# Altium PCB AphelionGroundStation.PcbDoc (part 2 of 3)
Units mm, origin at the board's own origin, x right, y up, seen from the top; angles counter-clockwise.
Board outline 70.66 x 90.48 mm, 2 copper layers (Top Layer, Bottom Layer); 32 components, 39 nets, 122 pads, 24 vias.
Unrouted connection lines stored in the file: 1.
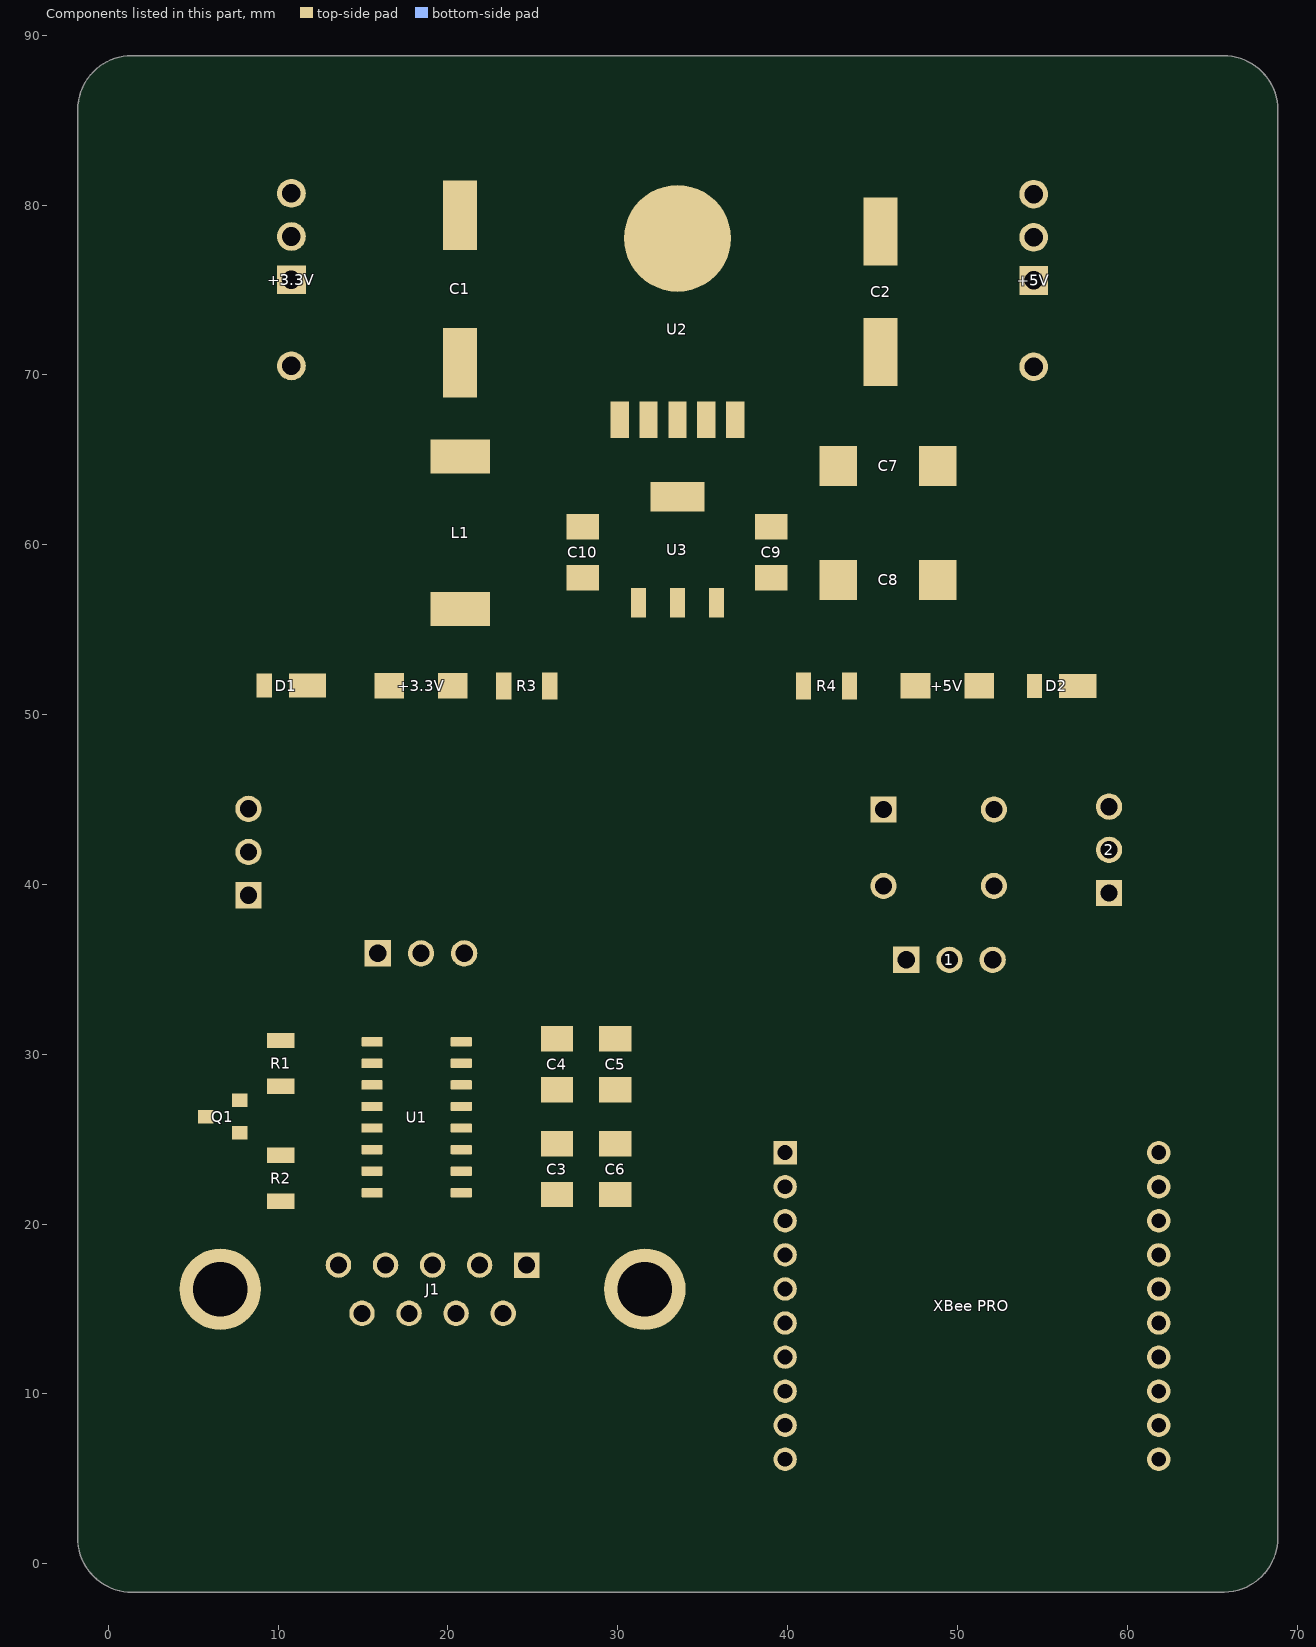
[diagram p2: the components of this part, seen from the top]

## Via types
v1: diameter 0.6, hole 0.3, Top Layer to Bottom Layer, 12 vias
v2: diameter 0.5, hole 0.3, Top Layer to Bottom Layer, 8 vias
v3: diameter 5, hole 3, Top Layer to Bottom Layer, 4 vias

## Nets (pads, with @x,y where several pads share a name; then routed paths per layer and width w, separated by ;. In a path a pad name is that pad's centre, name@x,y a point inside that pad or via, vN(x,y) a via of type N, cw(c..) or ccw(c..) an arc to the next point about the centre after c; other vN are vias at no path point) (continued)
copper on no net: (continued)
  Top Layer w0.025: 28.067,44.628 28.372,44.628 ; 28.067,44.653 28.346,44.653 ; 28.067,44.679 28.346,44.679 ; 28.067,44.704 28.346,44.704 ; 28.067,44.729 28.346,44.729 ; 28.067,44.755 28.346,44.755 ; 28.067,44.78 28.321,44.78 ; 28.067,44.806 28.321,44.806 ; 28.067,44.831 28.346,44.831 ; 28.067,44.856 28.321,44.856 ; 28.067,44.882 28.321,44.882 ; 28.067,44.907 28.321,44.907 ; 28.067,44.933 28.346,44.933 ; 28.067,44.958 28.321,44.958 ; 28.067,44.983 28.321,44.983 ; 28.067,45.009 28.321,45.009 ; 28.067,45.034 28.346,45.034 ; 28.067,45.06 28.346,45.06 ; 28.067,45.085 28.346,45.085 ; 28.067,45.11 28.346,45.11 ; 28.067,45.136 28.346,45.136 ; 28.067,45.161 28.346,45.161 ; 28.092,44.552 28.448,44.552 ; 28.092,44.577 28.448,44.577 ; 28.092,44.602 28.397,44.602 ; 28.092,45.187 28.448,45.187 ; 28.092,45.212 28.448,45.212 ; 28.118,44.475 28.931,44.475 ; 28.118,44.501 28.905,44.501 ; 28.118,44.526 28.956,44.526 ; 28.118,45.237 28.981,45.237 ; 28.118,45.263 28.956,45.263 ; 28.118,45.288 28.931,45.288 ; 28.169,44.425 28.88,44.425 ; 28.169,44.45 28.905,44.45 ; 28.169,45.314 28.905,45.314 ; 28.169,45.339 28.905,45.339 ; 28.219,44.399 28.829,44.399 ; 28.219,45.364 28.88,45.364 ; 28.219,45.39 28.88,45.39 ; 28.245,44.374 28.829,44.374 ; 28.296,45.415 28.778,45.415 ; 28.321,44.323 28.778,44.323 ; 28.321,44.348 28.778,44.348 ; 28.321,45.441 28.778,45.441 ; 28.397,45.466 28.651,45.466 ; 28.397,45.491 28.651,45.491 ; 28.448,44.298 28.6,44.298 ; 28.6,44.552 28.981,44.552 ; 28.6,44.577 28.981,44.577 ; 28.6,45.212 28.981,45.212 ; 28.626,45.187 28.981,45.187 ; 28.677,44.602 28.981,44.602 ; 28.677,44.628 28.981,44.628 ; 28.702,45.136 28.981,45.136 ; 28.702,45.161 28.981,45.161 ; 28.727,44.653 29.007,44.653 ; 28.727,44.679 29.007,44.679 ; 28.727,45.085 29.007,45.085 ; 28.727,45.11 29.007,45.11 ; 28.753,44.704 29.007,44.704 ; 28.753,44.729 29.007,44.729 ; 28.753,44.755 29.007,44.755 ; 28.753,44.78 29.007,44.78 ; 28.753,44.806 29.007,44.806 ; 28.753,44.831 29.007,44.831 ; 28.753,44.856 29.007,44.856 ; 28.753,44.882 29.007,44.882 ; 28.753,44.907 29.007,44.907 ; 28.753,44.933 29.007,44.933 ; 28.753,44.958 29.007,44.958 ; 28.753,44.983 29.007,44.983 ; 28.753,45.009 29.007,45.009 ; 28.753,45.034 29.007,45.034 ; 28.753,45.06 29.007,45.06 ; 29.185,42.57 29.439,42.57 ; 29.185,42.596 29.439,42.596 ; 29.185,42.621 29.439,42.621 ; 29.185,42.647 29.439,42.647 ; 29.185,42.672 29.439,42.672 ; 29.185,42.697 29.439,42.697 ; 29.185,42.723 29.439,42.723 ; 29.185,42.748 29.439,42.748 ; 29.185,42.774 29.439,42.774 ; 29.185,42.799 29.439,42.799 ; 29.185,42.824 29.439,42.824 ; 29.185,42.85 29.439,42.85 ; 29.185,42.875 29.439,42.875 ; 29.185,42.901 29.439,42.901 ; 29.185,42.926 29.439,42.926 ; 29.185,42.951 29.439,42.951 ; 29.185,42.977 29.439,42.977 ; 29.185,43.002 29.439,43.002 ; 29.185,43.028 29.439,43.028 ; 29.185,43.053 29.439,43.053 ; 29.185,43.078 29.439,43.078 ; 29.185,43.104 29.439,43.104 ; 29.185,43.129 29.439,43.129 ; 29.185,43.155 29.439,43.155 ; 29.185,43.18 29.439,43.18 ; 29.185,43.205 29.439,43.205 ; 29.185,43.231 29.439,43.231 ; 29.185,43.256 29.439,43.256 ; 29.185,43.282 29.439,43.282 ; 29.185,43.307 29.439,43.307 ; 29.185,43.332 29.489,43.332 ; 29.185,43.358 29.489,43.358 ; 29.185,43.383 29.54,43.383 ; 29.185,43.409 29.54,43.409 ; 29.185,43.434 29.642,43.434 ; 29.185,43.459 30.074,43.459 ; 29.185,43.485 30.074,43.485 ; 29.185,43.51 30.074,43.51 ; 29.185,43.536 30.074,43.536 ; 29.185,43.561 30.023,43.561 ; 29.185,43.586 29.997,43.586 ; 29.185,43.612 29.439,43.612 ; 29.185,43.637 29.439,43.637 ; 29.185,43.663 29.439,43.663 ; 29.185,43.688 29.439,43.688 ; 29.185,43.713 29.439,43.713 ; 29.185,43.739 29.439,43.739 ; 29.185,43.764 29.439,43.764 ; 29.185,43.79 29.439,43.79 ; 29.185,43.815 29.439,43.815 ; 29.185,43.84 29.439,43.84 ; 29.185,43.866 29.439,43.866 ; 29.185,43.891 29.439,43.891 ; 29.185,43.917 29.439,43.917 ; 29.185,43.942 29.439,43.942 ; 29.185,43.967 29.439,43.967 ; 29.185,43.993 29.439,43.993 ; 29.185,44.018 29.439,44.018 ; 29.185,44.044 29.439,44.044 ; 29.185,44.069 29.439,44.069 ; 29.185,44.094 29.439,44.094 ; 29.185,44.12 29.439,44.12 ; 29.185,44.145 29.439,44.145 ; 29.185,44.171 29.439,44.171 ; 29.185,44.196 29.439,44.196 ; 29.185,44.221 29.439,44.221 ; 29.185,44.247 29.439,44.247 ; 29.185,44.272 29.439,44.272 ; 29.185,44.298 29.439,44.298 ; 29.185,44.323 29.439,44.323 ; 29.185,44.348 29.439,44.348 ; 29.185,44.374 29.439,44.374 ; 29.185,44.399 29.972,44.399 ; 29.185,44.425 30.048,44.425 ; 29.185,44.45 30.048,44.45 ; 29.185,44.475 30.074,44.475 ; 29.185,44.501 30.074,44.501 ; 29.185,44.526 30.074,44.526 ; 29.185,44.552 29.566,44.552 ; 29.185,44.577 29.566,44.577 ; 29.185,44.602 29.515,44.602 ; 29.185,44.628 29.489,44.628 ; 29.185,44.653 29.464,44.653 ; 29.185,44.679 29.439,44.679 ; 29.185,44.704 29.439,44.704 ; 29.185,44.729 29.439,44.729 ; 29.185,44.755 29.439,44.755 ; 29.185,44.78 29.439,44.78 ; 29.185,44.806 29.439,44.806 ; 29.185,44.831 29.439,44.831 ; 29.185,44.856 29.439,44.856 ; 29.185,44.882 29.439,44.882 ; 29.185,44.907 29.439,44.907 ; 29.185,44.933 29.439,44.933 ; 29.185,44.958 29.439,44.958 ; 29.185,44.983 29.439,44.983 ; 29.185,45.009 29.439,45.009 ; 29.185,45.034 29.439,45.034 ; 29.185,45.06 29.439,45.06 ; 29.185,45.085 29.439,45.085 ; 29.185,45.11 29.439,45.11 ; 29.185,45.136 29.489,45.136 ; 29.185,45.161 29.489,45.161 ; 29.185,45.187 29.566,45.187 ; 29.185,45.212 29.566,45.212 ; 29.185,45.237 30.099,45.237 ; 29.185,45.263 30.074,45.263 ; 29.185,45.288 30.074,45.288 ; 29.185,45.314 30.048,45.314 ; 29.185,45.339 30.048,45.339 ; 29.185,45.364 29.997,45.364 ; 29.185,45.39 29.997,45.39 ; 29.185,45.415 29.439,45.415 ; 29.185,45.441 29.439,45.441 ; 29.21,42.52 29.439,42.52 ; 29.21,42.545 29.439,42.545 ; 29.21,45.491 29.235,45.491 ; 29.261,49.174 32.487,49.174 ; 29.261,49.2 32.487,49.2 ; 29.261,49.225 32.487,49.225 ; 29.261,49.251 32.436,49.251 ; 29.261,49.276 32.436,49.276 ; 29.261,49.301 32.436,49.301 ; 29.261,49.327 32.436,49.327 ; 29.261,49.352 32.41,49.352 ; 29.261,49.378 32.41,49.378 ; 29.261,49.403 32.41,49.403 ; 29.261,49.428 32.385,49.428 ; 29.261,49.454 32.385,49.454 ; 29.261,49.479 32.385,49.479 ; 29.261,49.505 32.385,49.505 ; 29.261,49.53 32.385,49.53 ; 29.261,49.555 32.385,49.555 ; 29.261,49.581 32.385,49.581 ; 29.261,49.606 32.385,49.606 ; 29.261,49.632 32.385,49.632 ; 29.261,49.657 32.385,49.657 ; 29.261,49.682 32.385,49.682 ; 29.261,49.708 32.385,49.708 ; 29.261,49.733 32.385,49.733 ; 29.261,49.759 32.385,49.759 ; 29.261,49.784 32.385,49.784 ; 29.261,49.809 32.385,49.809 ; 29.261,49.835 32.385,49.835 ; 29.261,49.86 32.385,49.86 ; 29.261,49.886 32.385,49.886 ; 29.261,49.911 32.385,49.911 ; 29.261,49.936 32.385,49.936 ; 29.261,49.962 32.385,49.962 ; 29.261,49.987 32.385,49.987 ; 29.261,50.013 32.41,50.013 ; 29.261,50.038 32.41,50.038 ; 29.261,50.063 32.41,50.063 ; 29.261,50.089 32.41,50.089 ; 29.261,50.114 32.436,50.114 ; 29.261,50.14 32.436,50.14 ; 29.261,50.165 32.436,50.165 ; 29.261,50.19 32.436,50.19 ; 29.261,50.216 32.487,50.216 ; 29.261,50.241 32.487,50.241 ; 29.261,50.267 32.487,50.267 ; 29.261,50.292 32.512,50.292 ; 29.312,49.124 32.512,49.124 ; 29.312,49.149 32.512,49.149 ; 29.312,50.317 32.537,50.317 ; 29.388,45.466 29.413,45.466 ; 29.388,45.491 29.413,45.491 ; 29.413,49.098 32.537,49.098 ; 29.413,50.343 32.537,50.343 ; 29.489,43.612 29.972,43.612 ; 29.489,43.637 29.972,43.637 ; 29.489,44.374 29.972,44.374 ; 29.489,45.415 29.972,45.415 ; 29.489,50.368 32.563,50.368 ; 29.54,44.323 29.921,44.323 ; 29.54,44.348 29.921,44.348 ; 29.54,45.441 29.921,45.441 ; 29.566,43.663 29.87,43.663 ; 29.566,49.073 32.563,49.073 ; 29.642,44.298 29.82,44.298 ; 29.642,45.466 29.82,45.466 ; 29.642,45.491 29.82,45.491 ; 29.642,50.394 32.563,50.394 ; 29.667,43.688 29.769,43.688 ; 29.667,49.047 32.588,49.047 ; 29.693,43.434 30.099,43.434 ; 29.743,44.552 30.099,44.552 ; 29.743,44.577 30.099,44.577 ; 29.743,45.212 30.099,45.212 ; 29.769,43.383 30.099,43.383 ; 29.769,43.409 30.099,43.409 ; 29.769,45.187 30.099,45.187 ; 29.769,49.022 32.588,49.022 ; 29.82,43.358 30.099,43.358 ; 29.82,44.602 30.099,44.602 ; 29.82,44.628 30.099,44.628 ; 29.82,45.136 30.099,45.136 ; 29.82,45.161 30.099,45.161 ; 29.82,50.419 32.588,50.419 ; 29.845,43.256 30.099,43.256 ; 29.845,43.282 30.099,43.282 ; 29.845,43.307 30.099,43.307 ; 29.845,43.332 30.099,43.332 ; 29.845,44.653 30.099,44.653 ; 29.845,44.679 30.099,44.679 ; 29.845,44.704 30.099,44.704 ; 29.845,44.729 30.099,44.729 ; 29.845,45.034 30.099,45.034 ; 29.845,45.06 30.099,45.06 ; 29.845,45.085 30.099,45.085 ; 29.845,45.11 30.099,45.11 ; 29.87,42.52 30.099,42.52 ; 29.87,42.545 30.099,42.545 ; 29.87,42.57 30.099,42.57 ; 29.87,42.596 30.099,42.596 ; 29.87,42.621 30.099,42.621 ; 29.87,42.647 30.099,42.647 ; 29.87,42.672 30.099,42.672 ; 29.87,42.697 30.099,42.697 ; 29.87,42.723 30.099,42.723 ; 29.87,42.748 30.099,42.748 ; 29.87,42.774 30.099,42.774 ; 29.87,42.799 30.099,42.799 ; 29.87,42.824 30.099,42.824 ; 29.87,42.85 30.099,42.85 ; 29.87,42.875 30.099,42.875 ; 29.87,42.901 30.099,42.901 ; 29.87,42.926 30.099,42.926 ; 29.87,42.951 30.099,42.951 ; 29.87,42.977 30.099,42.977 ; 29.87,43.002 30.099,43.002 ; 29.87,43.028 30.099,43.028 ; 29.87,43.053 30.099,43.053 ; 29.87,43.078 30.099,43.078 ; 29.87,43.104 30.099,43.104 ; 29.87,43.129 30.099,43.129 ; 29.87,43.155 30.099,43.155 ; 29.87,43.18 30.099,43.18 ; 29.87,43.205 30.099,43.205 ; 29.87,43.231 30.099,43.231 ; 29.87,44.755 30.099,44.755 ; 29.87,44.78 30.099,44.78 ; 29.87,44.806 30.099,44.806 ; 29.87,44.831 30.099,44.831 ; 29.87,44.856 30.15,44.856 ; 29.87,44.882 30.15,44.882 ; 29.87,44.907 30.15,44.907 ; 29.87,44.933 30.15,44.933 ; 29.87,44.958 30.099,44.958 ; 29.87,44.983 30.099,44.983 ; 29.87,45.009 30.099,45.009 ; 29.972,48.997 32.614,48.997 ; 30.023,50.444 32.614,50.444 ; 30.023,50.47 32.639,50.47 ; 30.099,47.142 32.487,47.142 ; 30.099,52.299 36.957,52.299 ; 30.099,52.324 36.957,52.324 ; 30.124,47.092 32.487,47.092 ; 30.124,47.117 32.487,47.117 ; 30.124,47.168 32.512,47.168 ; 30.124,47.193 32.512,47.193 ; 30.124,52.222 36.932,52.222 ; 30.124,52.248 36.932,52.248 ; 30.124,52.273 36.932,52.273 ; 30.124,52.349 36.932,52.349 ; 30.15,47.219 32.512,47.219 ; 30.15,47.244 32.537,47.244 ; 30.15,52.375 36.906,52.375 ; 30.175,47.066 32.487,47.066 ; 30.175,48.946 32.664,48.946 ; 30.175,48.971 32.614,48.971 ; 30.175,52.172 36.881,52.172 ; 30.175,52.197 36.881,52.197 ; 30.201,47.041 32.436,47.041 ; 30.201,47.269 32.563,47.269 ; 30.201,47.295 32.563,47.295 ; 30.201,47.32 32.563,47.32 ; 30.201,47.346 32.588,47.346 ; 30.201,50.495 32.664,50.495 ; 30.201,52.121 36.855,52.121 ; 30.201,52.146 36.855,52.146 ; 30.201,52.4 36.855,52.4 ; 30.201,52.426 36.855,52.426 ; 30.251,42.774 30.632,42.774 ; 30.251,42.799 30.531,42.799 ; 30.251,42.824 30.531,42.824 ; 30.251,42.85 30.531,42.85 ; 30.251,42.875 30.531,42.875 ; 30.251,42.901 30.531,42.901 ; 30.251,42.926 30.531,42.926 ; 30.251,44.704 30.531,44.704 ; 30.251,44.729 30.531,44.729 ; 30.251,44.755 30.531,44.755 ; 30.251,44.78 30.531,44.78 ; 30.251,44.806 31.242,44.806 ; 30.251,44.831 31.242,44.831 ; 30.251,44.856 31.242,44.856 ; 30.251,44.882 31.242,44.882 ; 30.251,44.907 31.242,44.907 ; 30.251,44.933 31.242,44.933 ; 30.251,44.958 31.242,44.958 ; 30.251,44.983 31.242,44.983 ; 30.251,45.009 31.242,45.009 ; 30.251,45.034 30.531,45.034 ; 30.251,45.06 30.531,45.06 ; 30.251,46.99 32.436,46.99 ; 30.251,47.015 32.436,47.015 ; 30.251,47.371 32.588,47.371 ; 30.251,52.07 36.805,52.07 ; 30.251,52.095 36.805,52.095 ; 30.251,52.451 36.805,52.451 ; 30.251,52.476 36.805,52.476 ; 30.277,42.697 31.191,42.697 ; 30.277,42.723 31.191,42.723 ; 30.277,42.748 31.191,42.748 ; 30.277,42.951 30.531,42.951 ; 30.277,42.977 30.531,42.977 ; 30.277,43.002 31.191,43.002 ; 30.277,44.628 30.582,44.628 ; 30.277,44.653 30.531,44.653 ; 30.277,44.679 30.531,44.679 ; 30.277,45.085 30.531,45.085 ; 30.277,45.11 30.531,45.11 ; 30.277,45.136 30.531,45.136 ; 30.277,45.161 30.531,45.161 ; 30.277,46.939 32.41,46.939 ; 30.277,46.965 32.41,46.965 ; 30.277,47.396 32.588,47.396 ; 30.302,42.672 31.191,42.672 ; 30.302,43.028 31.191,43.028 ; 30.302,43.053 31.191,43.053 ; 30.302,43.078 31.191,43.078 ; 30.302,43.485 31.166,43.485 ; 30.302,43.51 31.166,43.51 ; 30.302,43.536 31.166,43.536 ; 30.302,44.526 31.166,44.526 ; 30.302,44.552 30.632,44.552 ; 30.302,44.577 30.632,44.577 ; 30.302,44.602 30.582,44.602 ; 30.302,45.187 30.632,45.187 ; 30.302,45.212 30.632,45.212 ; 30.302,45.237 31.166,45.237 ; 30.302,45.263 31.166,45.263 ; 30.302,46.914 32.41,46.914 ; 30.302,47.422 32.614,47.422 ; 30.302,47.447 32.614,47.447 ; 30.302,47.473 32.614,47.473 ; 30.302,50.521 32.664,50.521 ; 30.302,51.968 36.754,51.968 ; 30.302,51.994 36.754,51.994 ; 30.302,52.019 36.754,52.019 ; 30.302,52.045 36.779,52.045 ; 30.302,52.502 31.902,52.502 ; 30.302,52.527 31.826,52.527 ; 30.353,42.621 31.191,42.621 ; 30.353,42.647 31.191,42.647 ; 30.353,43.104 31.191,43.104 ; 30.353,43.459 31.166,43.459 ; 30.353,43.561 30.378,43.561 ; 30.353,44.475 31.191,44.475 ; 30.353,44.501 31.191,44.501 ; 30.353,45.288 31.14,45.288 ; 30.353,46.888 31.775,46.888 ; 30.353,47.498 32.664,47.498 ; 30.353,47.523 32.664,47.523 ; 30.353,47.549 32.664,47.549 ; 30.353,48.92 32.664,48.92 ; 30.353,51.892 36.703,51.892 ; 30.353,51.918 36.703,51.918 ; 30.353,51.943 36.703,51.943 ; 30.353,52.553 31.801,52.553 ; 30.353,52.578 31.801,52.578 ; 30.404,42.57 31.191,42.57 ; 30.404,42.596 31.191,42.596 ; 30.404,43.129 31.191,43.129 ; 30.404,43.155 31.191,43.155 ; 30.404,43.434 30.582,43.434 ; 30.404,43.561 31.115,43.561 ; 30.404,43.586 31.09,43.586 ; 30.404,44.425 31.166,44.425 ; 30.404,44.45 31.166,44.45 ; 30.404,45.314 31.09,45.314 ; 30.404,45.339 31.09,45.339 ; 30.404,46.838 31.75,46.838 ; 30.404,46.863 31.775,46.863 ; 30.404,47.574 32.664,47.574 ; 30.404,47.6 32.715,47.6 ; 30.404,48.844 32.741,48.844 ; 30.404,48.87 32.715,48.87 ; 30.404,48.895 32.715,48.895 ; 30.404,51.841 36.652,51.841 ; 30.404,51.867 36.652,51.867 ; 30.404,52.603 31.725,52.603 ; 30.429,43.612 31.064,43.612 ; 30.429,43.637 31.064,43.637 ; 30.429,44.399 31.064,44.399 ; 30.429,45.364 31.064,45.364 ; 30.429,45.39 31.064,45.39 ; 30.429,46.812 31.674,46.812 ; 30.429,47.625 32.715,47.625 ; 30.429,48.768 32.868,48.768 ; 30.429,48.793 32.817,48.793 ; 30.429,48.819 32.766,48.819 ; 30.429,50.546 32.715,50.546 ; 30.429,50.571 32.715,50.571 ; 30.429,50.597 32.766,50.597 ; 30.429,50.622 32.817,50.622 ; 30.429,51.791 36.627,51.791 ; 30.429,51.816 36.627,51.816 ; 30.429,52.629 31.674,52.629 ; 30.429,52.654 31.674,52.654 ; 30.455,43.383 30.531,43.383 ; 30.455,43.409 30.531,43.409 ; 30.455,44.374 31.064,44.374 ; 30.455,46.761 31.623,46.761 ; 30.455,46.787 31.623,46.787 ; 30.455,47.65 32.715,47.65 ; 30.455,47.676 32.715,47.676 ; 30.455,48.666 33.02,48.666 ; 30.455,48.692 32.918,48.692 ; 30.455,48.717 32.918,48.717 ; 30.455,48.743 32.868,48.743 ; 30.455,50.648 32.842,50.648 ; 30.455,50.673 32.842,50.673 ; 30.455,51.74 36.601,51.74 ; 30.455,51.765 36.601,51.765 ; 30.455,52.68 31.623,52.68 ; 30.48,42.545 30.912,42.545 ; 30.48,43.18 31.191,43.18 ; 30.48,43.205 31.191,43.205 ; 30.48,45.415 30.963,45.415 ; 30.48,47.701 32.715,47.701 ; 30.48,50.698 32.918,50.698 ; 30.48,50.724 32.918,50.724 ; 30.505,43.663 30.963,43.663 ; 30.505,46.736 31.572,46.736 ; 30.505,47.727 32.715,47.727 ; 30.505,48.59 33.045,48.59 ; 30.505,48.616 33.045,48.616 ; 30.505,48.641 33.045,48.641 ; 30.505,50.749 33.02,50.749 ; 30.505,50.775 33.045,50.775 ; 30.505,51.714 36.551,51.714 ; 30.505,52.705 31.572,52.705 ; 30.531,42.52 30.836,42.52 ; 30.531,44.323 31.013,44.323 ; 30.531,44.348 31.013,44.348 ; 30.531,45.441 30.963,45.441 ; 30.531,46.711 31.547,46.711 ; 30.531,47.752 32.715,47.752 ; 30.531,47.777 32.741,47.777 ; 30.531,47.803 32.766,47.803 ; 30.531,48.463 33.045,48.463 ; 30.531,48.489 33.045,48.489 ; 30.531,48.514 33.045,48.514 ; 30.531,48.539 33.045,48.539 ; 30.531,48.565 33.096,48.565 ; 30.531,50.8 33.147,50.8 ; 30.531,50.825 33.147,50.825 ; 30.531,50.851 33.249,50.851 ; 30.531,51.638 36.525,51.638 ; 30.531,51.664 36.525,51.664 ; 30.531,51.689 36.525,51.689 ; 30.531,52.73 31.521,52.73 ; 30.531,52.756 31.521,52.756 ; 30.582,46.66 31.496,46.66 ; 30.582,46.685 31.496,46.685 ; 30.582,47.828 32.766,47.828 ; 30.582,47.854 32.817,47.854 ; 30.582,48.412 33.045,48.412 ; 30.582,48.438 33.045,48.438 ; 30.582,50.876 36.474,50.876 ; 30.582,50.902 36.474,50.902 ; 30.582,50.927 36.474,50.927 ; 30.582,50.952 36.474,50.952 ; 30.582,51.613 36.474,51.613 ; 30.582,52.781 31.471,52.781 ; 30.582,52.807 31.471,52.807 ; 30.607,46.609 31.42,46.609 ; 30.607,46.634 31.42,46.634 ; 30.607,47.879 32.817,47.879 ; 30.607,47.904 32.817,47.904 ; 30.607,48.311 32.995,48.311 ; 30.607,48.336 32.995,48.336 ; 30.607,48.362 33.02,48.362 ; 30.607,48.387 33.02,48.387 ; 30.607,50.978 36.449,50.978 ; 30.607,51.003 36.449,51.003 ; 30.607,51.537 36.449,51.537 ; 30.607,51.562 36.449,51.562 ; 30.607,51.587 36.474,51.587 ; 30.632,45.466 30.836,45.466 ; 30.632,45.491 30.836,45.491 ; 30.632,46.584 31.344,46.584 ; 30.632,47.93 32.817,47.93 ; 30.632,47.955 32.842,47.955 ; 30.632,48.235 32.944,48.235 ; 30.632,48.26 32.944,48.26 ; 30.632,48.285 32.944,48.285 ; 30.632,51.029 36.424,51.029 ; 30.632,51.054 36.424,51.054 ; 30.632,51.079 36.424,51.079 ; 30.632,51.105 36.424,51.105 ; 30.632,51.13 36.424,51.13 ; 30.632,51.511 36.424,51.511 ; 30.632,52.832 31.394,52.832 ; 30.632,52.857 31.344,52.857 ; 30.658,43.688 30.785,43.688 ; 30.658,44.298 30.861,44.298 ; 30.683,46.558 31.318,46.558 ; 30.683,47.981 32.842,47.981 ; 30.683,48.006 32.842,48.006 ; 30.683,48.108 32.893,48.108 ; 30.683,48.133 32.918,48.133 ; 30.683,48.158 32.918,48.158 ; 30.683,48.184 32.918,48.184 ; 30.683,48.209 32.918,48.209 ; 30.683,51.156 36.373,51.156 ; 30.683,51.181 36.373,51.181 ; 30.683,51.206 36.373,51.206 ; 30.683,51.232 36.373,51.232 ; 30.683,51.41 36.373,51.41 ; 30.683,51.435 36.373,51.435 ; 30.683,51.46 36.373,51.46 ; 30.683,51.486 36.373,51.486 ; 30.683,52.883 31.293,52.883 ; 30.683,52.908 31.293,52.908 ; 30.734,46.507 31.293,46.507 ; 30.734,46.533 31.293,46.533 ; 30.734,48.031 32.868,48.031 ; 30.734,48.057 32.868,48.057 ; 30.734,48.082 32.893,48.082 ; 30.734,51.257 36.322,51.257 ; 30.734,51.283 36.322,51.283 ; 30.734,51.308 36.322,51.308 ; 30.734,51.333 36.322,51.333 ; 30.734,51.359 36.322,51.359 ; 30.734,51.384 36.322,51.384 ; 30.734,52.934 31.242,52.934 ; 30.759,46.482 31.191,46.482 ; 30.759,52.959 31.191,52.959 ; 30.759,52.984 31.191,52.984 ; 30.785,46.431 31.166,46.431 ; 30.785,46.457 31.166,46.457 ; 30.785,53.01 31.166,53.01 ; 30.836,46.406 31.09,46.406 ; 30.836,53.035 31.09,53.035 ; 30.861,42.774 31.191,42.774 ; 30.861,43.434 31.191,43.434 ; 30.861,45.187 31.191,45.187 ; 30.861,45.212 31.166,45.212 ; 30.861,46.38 31.064,46.38 ; 30.861,53.061 31.064,53.061 ; 30.861,53.086 31.064,53.086 ; 30.912,43.383 31.191,43.383 ; 30.912,43.409 31.191,43.409 ; 30.912,44.552 31.115,44.552 ; 30.912,44.577 31.115,44.577 ; 30.912,45.136 31.191,45.136 ; 30.912,45.161 31.191,45.161 ; 30.912,46.33 30.988,46.33 ; 30.912,46.355 30.988,46.355 ; 30.912,53.111 30.988,53.111 ; 30.912,53.137 30.988,53.137 ; 30.937,42.52 31.191,42.52 ; 30.937,42.545 31.191,42.545 ; 30.937,42.799 31.191,42.799 ; 30.937,42.824 31.191,42.824 ; 30.937,42.85 31.191,42.85 ; 30.937,42.875 31.191,42.875 ; 30.937,42.901 31.191,42.901 ; 30.937,42.926 31.191,42.926 ; 30.937,42.951 31.191,42.951 ; 30.937,42.977 31.191,42.977 ; 30.937,43.231 31.191,43.231 ; 30.937,43.256 31.191,43.256 ; 30.937,43.282 31.191,43.282 ; 30.937,43.307 31.191,43.307 ; 30.937,43.332 31.191,43.332 ; 30.937,43.358 31.191,43.358 ; 30.937,45.06 31.191,45.06 ; 30.937,45.085 31.191,45.085 ; 30.937,45.11 31.191,45.11 ; 30.963,44.602 31.064,44.602 ; 30.963,44.628 31.064,44.628 ; 30.963,45.034 31.191,45.034 ; 31.369,44.323 31.623,44.323 ; 31.369,44.348 31.623,44.348 ; 31.369,44.374 31.623,44.374 ; 31.369,44.399 31.623,44.399 ; 31.369,44.425 31.623,44.425 ; 31.369,44.45 31.623,44.45 ; 31.369,44.475 31.623,44.475 ; 31.369,44.501 31.623,44.501 ; 31.369,44.526 31.623,44.526 ; 31.369,44.552 31.623,44.552 ; 31.369,44.577 31.623,44.577 ; 31.369,44.602 31.623,44.602 ; 31.369,44.628 31.623,44.628 ; 31.369,44.653 31.623,44.653 ; 31.369,44.679 31.623,44.679 ; 31.369,44.704 31.623,44.704 ; 31.369,44.729 31.623,44.729 ; 31.369,44.755 31.623,44.755 ; 31.369,44.78 31.623,44.78 ; 31.369,44.806 31.623,44.806 ; 31.369,44.831 31.623,44.831 ; 31.369,44.856 31.623,44.856 ; 31.369,44.882 31.623,44.882 ; 31.369,44.907 31.623,44.907 ; 31.369,44.933 31.623,44.933 ; 31.369,44.958 31.623,44.958 ; 31.369,44.983 31.623,44.983 ; 31.369,45.009 31.623,45.009 ; 31.369,45.034 31.623,45.034 ; 31.369,45.06 31.623,45.06 ; 31.369,45.085 31.674,45.085 ; 31.369,45.11 31.674,45.11 ; 31.369,45.136 31.674,45.136 ; 31.369,45.161 31.674,45.161 ; 31.369,45.187 31.775,45.187 ; 31.369,45.212 31.775,45.212 ; 31.369,45.237 32.283,45.237 ; 31.369,45.263 32.283,45.263 ; 31.369,45.288 32.258,45.288 ; 31.369,45.314 32.258,45.314 ; 31.369,45.339 32.258,45.339 ; 31.369,45.364 32.233,45.364 ; 31.369,45.39 32.207,45.39 ; 31.369,45.415 31.623,45.415 ; 31.369,45.441 31.648,45.441 ; 31.394,42.545 31.674,42.545 ; 31.394,42.57 31.674,42.57 ; 31.394,42.596 31.674,42.596 ; 31.394,42.621 31.674,42.621 ; 31.394,42.647 31.674,42.647 ; 31.394,42.672 31.674,42.672 ; 31.394,42.697 31.674,42.697 ; 31.394,42.723 31.674,42.723 ; 31.394,42.748 31.674,42.748 ; 31.394,42.774 31.674,42.774 ; 31.394,42.799 31.674,42.799 ; 31.394,42.824 31.674,42.824 ; 31.394,42.85 31.674,42.85 ; 31.394,42.875 31.674,42.875 ; 31.394,42.901 31.674,42.901 ; 31.394,42.926 31.674,42.926 ; 31.394,42.951 31.674,42.951 ; 31.394,42.977 31.674,42.977 ; 31.394,43.002 31.674,43.002 ; 31.394,43.028 31.674,43.028 ; 31.394,43.053 31.674,43.053 ; 31.394,43.078 31.674,43.078 ; 31.394,43.104 31.674,43.104 ; 31.394,43.129 31.674,43.129 ; 31.394,43.155 31.674,43.155 ; 31.394,43.18 31.674,43.18 ; 31.394,43.205 31.674,43.205 ; 31.394,43.231 31.674,43.231 ; 31.394,43.256 31.674,43.256 ; 31.394,43.282 31.674,43.282 ; 31.394,43.307 31.674,43.307 ; 31.394,43.332 31.725,43.332 ; 31.394,43.358 31.725,43.358 ; 31.394,43.383 31.75,43.383 ; 31.394,43.409 31.75,43.409 ; 31.394,43.434 31.852,43.434 ; 31.394,43.459 32.106,43.459 ; 31.394,43.485 32.156,43.485 ; 31.394,43.51 32.156,43.51 ; 31.394,43.536 32.182,43.536 ; 31.394,43.561 31.674,43.561 ; 31.394,43.586 31.674,43.586 ; 31.394,43.612 31.674,43.612 ; 31.394,43.637 31.674,43.637 ; 31.42,42.52 31.674,42.52 ; 31.42,43.663 31.674,43.663 ; 31.42,45.466 31.445,45.466 ; 31.42,45.491 31.445,45.491 ; 31.699,43.561 32.233,43.561 ; 31.699,43.586 32.233,43.586 ; 31.725,43.612 32.182,43.612 ; 31.725,43.637 32.182,43.637 ; 31.725,45.415 32.156,45.415 ; 31.725,45.441 32.106,45.441 ; 31.826,43.663 32.106,43.663 ; 31.826,45.466 32.029,45.466 ; 31.826,45.491 32.029,45.491 ; 31.902,46.888 32.385,46.888 ; 31.928,43.434 32.106,43.434 ; 31.928,43.688 32.004,43.688 ; 31.953,45.187 32.283,45.187 ; 31.953,45.212 32.283,45.212 ; 31.953,52.502 35.103,52.502 ; 31.979,46.838 32.385,46.838 ; 31.979,46.863 32.385,46.863 ; 32.004,43.383 32.055,43.383 ; 32.004,43.409 32.08,43.409 ; 32.029,45.11 32.334,45.11 ; 32.029,45.136 32.334,45.136 ; 32.029,45.161 32.334,45.161 ; 32.029,46.812 32.385,46.812 ; 32.055,44.323 32.334,44.323 ; 32.055,44.348 32.334,44.348 ; 32.055,44.374 32.334,44.374 ; 32.055,44.399 32.334,44.399 ; 32.055,44.425 32.334,44.425 ; 32.055,44.45 32.334,44.45 ; 32.055,44.475 32.334,44.475 ; 32.055,44.501 32.334,44.501 ; 32.055,44.526 32.334,44.526 ; 32.055,44.552 32.334,44.552 ; 32.055,44.577 32.334,44.577 ; 32.055,44.602 32.334,44.602 ; 32.055,44.628 32.334,44.628 ; 32.055,44.653 32.334,44.653 ; 32.055,44.679 32.334,44.679 ; 32.055,44.704 32.334,44.704 ; 32.055,44.729 32.334,44.729 ; 32.055,44.755 32.334,44.755 ; 32.055,44.78 32.334,44.78 ; 32.055,44.806 32.334,44.806 ; 32.055,44.831 32.334,44.831 ; 32.055,44.856 32.334,44.856 ; 32.055,44.882 32.334,44.882 ; 32.055,44.907 32.334,44.907 ; 32.055,44.933 32.334,44.933 ; 32.055,44.958 32.334,44.958 ; 32.055,44.983 32.334,44.983 ; 32.055,45.009 32.334,45.009 ; 32.055,45.034 32.334,45.034 ; 32.055,45.06 32.334,45.06 ; 32.055,45.085 32.334,45.085 ; 32.055,52.527 35.001,52.527 ; 32.106,46.761 32.334,46.761 ; 32.106,46.787 32.334,46.787 ; 32.131,52.553 34.925,52.553 ; 32.156,52.578 34.9,52.578 ; 32.182,43.002 32.487,43.002 ; 32.182,43.028 32.487,43.028 ; 32.182,43.053 32.487,43.053 ; 32.182,43.078 32.487,43.078 ; 32.182,43.104 32.487,43.104 ; 32.182,43.129 32.487,43.129 ; 32.182,43.155 32.487,43.155 ; 32.182,43.18 32.487,43.18 ; 32.182,46.736 32.334,46.736 ; 32.207,42.774 33.147,42.774 ; 32.207,42.799 32.512,42.799 ; 32.207,42.824 32.512,42.824 ; 32.207,42.85 32.487,42.85 ; 32.207,42.875 32.487,42.875 ; 32.207,42.901 32.487,42.901 ; 32.207,42.926 32.487,42.926 ; 32.207,42.951 32.487,42.951 ; 32.207,42.977 32.487,42.977 ; 32.207,43.205 32.487,43.205 ; 32.207,43.231 32.487,43.231 ; 32.207,43.256 32.487,43.256 ; 32.207,43.282 32.487,43.282 ; 32.207,43.307 32.487,43.307 ; 32.207,43.332 32.487,43.332 ; 32.207,43.358 32.512,43.358 ; 32.207,43.383 32.537,43.383 ; 32.207,43.409 32.537,43.409 ; 32.207,43.434 32.614,43.434 ; 32.258,42.697 33.147,42.697 ; 32.258,42.723 33.147,42.723 ; 32.258,42.748 33.147,42.748 ; 32.258,43.459 33.147,43.459 ; 32.258,43.485 33.147,43.485 ; 32.258,43.51 33.147,43.51 ; 32.258,46.711 32.283,46.711 ; 32.258,52.603 34.798,52.603 ; 32.283,42.621 33.147,42.621 ; 32.283,42.647 33.147,42.647 ; 32.283,42.672 33.147,42.672 ; 32.283,43.536 33.147,43.536 ; 32.283,43.561 33.147,43.561 ; 32.283,52.629 34.747,52.629 ; 32.283,52.654 32.309,52.654 ; 32.309,43.586 33.147,43.586 ; 32.334,52.654 34.747,52.654 ; 32.36,42.57 32.842,42.57 ; 32.36,42.596 32.842,42.596 ; 32.36,43.612 32.817,43.612 ; 32.36,43.637 32.817,43.637 ; 32.385,42.545 32.817,42.545 ; 32.385,52.68 34.671,52.68 ; 32.436,43.663 32.766,43.663 ; 32.487,42.52 32.715,42.52 ; 32.487,52.705 34.569,52.705 ; 32.537,43.688 32.639,43.688 ; 32.588,52.73 34.468,52.73 ; 32.588,52.756 34.468,52.756 ; 32.664,52.781 34.392,52.781 ; 32.69,52.807 34.366,52.807 ; 32.715,43.434 33.147,43.434 ; 32.715,52.832 34.341,52.832 ; 32.715,52.857 34.341,52.857 ; 32.715,52.883 34.341,52.883 ; 32.715,52.908 34.341,52.908 ; 32.715,52.934 34.341,52.934 ; 32.766,52.959 34.29,52.959 ; 32.766,52.984 34.29,52.984 ; 32.766,53.01 34.29,53.01 ; 32.766,53.035 34.29,53.035 ; 32.766,53.061 34.29,53.061 ; 32.766,53.086 34.29,53.086 ; 32.766,53.111 34.29,53.111 ; 32.766,53.137 34.29,53.137 ; 32.791,43.383 33.147,43.383 ; 32.791,43.409 33.147,43.409 ; 32.791,53.162 34.265,53.162 ; 32.791,53.188 34.265,53.188 ; 32.791,53.213 34.265,53.213 ; 32.791,53.238 34.265,53.238 ; 32.791,53.264 34.265,53.264 ; 32.791,53.289 34.265,53.289 ; 32.817,42.799 33.147,42.799 ; 32.817,42.824 33.147,42.824 ; 32.817,42.85 33.147,42.85 ; 32.817,42.875 33.147,42.875 ; 32.817,43.332 33.147,43.332 ; 32.817,43.358 33.147,43.358 ; 32.817,53.315 34.265,53.315 ; 32.817,53.34 34.265,53.34 ; 32.817,53.365 34.239,53.365 ; 32.817,53.391 34.239,53.391 ; 32.817,53.416 34.239,53.416 ; 32.817,53.442 34.239,53.442 ; 32.817,53.467 34.239,53.467 ; 32.817,53.492 34.239,53.492 ; 32.817,53.518 34.239,53.518 ; 32.817,53.543 34.188,53.543 ; 32.868,42.52 33.147,42.52 ; 32.868,42.545 33.147,42.545 ; 32.868,42.57 33.147,42.57 ; 32.868,42.596 33.147,42.596 ; 32.868,42.901 33.147,42.901 ; 32.868,42.926 33.147,42.926 ; 32.868,42.951 33.147,42.951 ; 32.868,42.977 33.147,42.977 ; 32.868,43.002 33.147,43.002 ; 32.868,43.028 33.147,43.028 ; 32.868,43.053 33.147,43.053 ; 32.868,43.078 33.147,43.078 ; 32.868,43.104 33.147,43.104 ; 32.868,43.129 33.147,43.129 ; 32.868,43.155 33.147,43.155 ; 32.868,43.18 33.147,43.18 ; 32.868,43.205 33.147,43.205 ; 32.868,43.231 33.147,43.231 ; 32.868,43.256 33.147,43.256 ; 32.868,43.282 33.147,43.282 ; 32.868,43.307 33.147,43.307 ; 32.868,43.612 33.147,43.612 ; 32.868,43.637 33.147,43.637 ; 32.868,43.663 33.147,43.663 ; 32.868,43.688 33.147,43.688 ; 32.868,43.713 33.147,43.713 ; 32.868,43.739 33.147,43.739 ; 32.868,43.764 33.147,43.764 ; 32.868,43.79 33.147,43.79 ; 32.868,43.815 33.147,43.815 ; 32.868,43.84 33.147,43.84 ; 32.868,43.866 33.147,43.866 ; 32.868,43.891 33.147,43.891 ; 32.868,43.917 33.147,43.917 ; 32.868,43.942 33.147,43.942 ; 32.868,43.967 33.147,43.967 ; 32.868,43.993 33.147,43.993 ; 32.868,44.018 33.147,44.018 ; 32.868,44.044 33.147,44.044 ; 32.868,44.069 33.147,44.069 ; 32.868,44.094 33.147,44.094 ; 32.868,44.12 33.147,44.12 ; 32.868,44.145 33.122,44.145 ; 32.868,53.569 34.188,53.569 ; 32.868,53.594 34.188,53.594 ; 32.868,53.619 34.188,53.619 ; 32.868,53.645 34.188,53.645 ; 32.868,53.67 34.188,53.67 ; 32.868,53.696 34.188,53.696 ; 32.868,53.721 34.188,53.721 ; 32.918,44.475 33.858,44.475 ; 32.918,44.501 33.858,44.501 ; 32.918,44.526 33.909,44.526 ; 32.918,53.746 34.138,53.746 ; 32.918,53.772 34.138,53.772 ; 32.918,53.797 34.138,53.797 ; 32.918,53.823 34.138,53.823 ; 32.918,53.848 34.138,53.848 ; 32.918,53.873 34.138,53.873 ; 32.918,53.899 34.138,53.899 ; 32.918,53.924 34.138,53.924 ; 32.918,53.95 34.138,53.95 ; 32.969,44.425 33.807,44.425 ; 32.969,44.45 33.807,44.45 ; 32.969,44.552 33.274,44.552 ; 32.969,44.577 33.274,44.577 ; 32.969,45.085 33.249,45.085 ; 32.969,45.11 33.249,45.11 ; 32.969,45.136 33.249,45.136 ; 32.969,45.161 33.249,45.161 ; 32.969,45.187 33.274,45.187 ; 32.995,45.06 33.299,45.06 ; 33.02,44.602 33.198,44.602 ; 33.02,44.628 33.198,44.628 ; 33.02,44.958 33.782,44.958 ; 33.02,44.983 33.68,44.983 ; 33.02,45.009 33.68,45.009 ; 33.02,45.034 33.299,45.034 ; 33.02,45.212 33.274,45.212 ; 33.02,45.237 33.807,45.237 ; 33.02,45.263 33.807,45.263 ; 33.02,45.288 33.858,45.288 ; 33.045,44.399 33.782,44.399 ; 33.045,44.653 33.096,44.653 ; 33.045,44.679 33.096,44.679 ; 33.045,44.907 33.807,44.907 ; 33.045,44.933 33.807,44.933 ; 33.045,45.314 33.909,45.314 ; 33.045,45.339 33.884,45.339 ; 33.096,44.374 33.757,44.374 ; 33.096,44.856 33.858,44.856 ; 33.096,44.882 33.807,44.882 ; 33.096,45.364 33.807,45.364 ; 33.096,45.39 33.807,45.39 ; 33.147,44.323 33.68,44.323 ; 33.147,45.415 33.782,45.415 ; 33.198,44.348 33.68,44.348 ; 33.198,44.806 33.909,44.806 ; 33.198,44.831 33.909,44.831 ; 33.198,45.441 33.706,45.441 ; 33.249,43.51 33.528,43.51 ; 33.249,43.536 33.528,43.536 ; 33.249,43.561 33.528,43.561 ; 33.249,43.586 33.528,43.586 ; 33.249,43.612 33.528,43.612 ; 33.249,43.637 33.528,43.637 ; 33.249,43.663 33.503,43.663 ; 33.299,43.383 33.579,43.383 ; 33.299,43.409 33.579,43.409 ; 33.299,43.434 33.579,43.434 ; 33.299,43.459 33.579,43.459 ; 33.299,43.485 33.579,43.485 ; 33.299,45.466 33.579,45.466 ; 33.299,45.491 33.579,45.491 ; 33.325,44.298 33.528,44.298 ; 33.35,43.282 33.604,43.282 ; 33.35,43.307 33.604,43.307 ; 33.35,43.332 33.579,43.332 ; 33.35,43.358 33.579,43.358 ; 33.376,43.129 33.655,43.129 ; 33.376,43.155 33.655,43.155 ; 33.376,43.18 33.655,43.18 ; 33.376,43.205 33.655,43.205 ; 33.376,43.231 33.604,43.231 ; 33.376,43.256 33.604,43.256 ; 33.401,43.053 33.68,43.053 ; 33.401,43.078 33.68,43.078 ; 33.401,43.104 33.655,43.104 ; 33.426,43.028 33.68,43.028 ; 33.426,44.755 33.909,44.755 ; 33.426,44.78 33.909,44.78 ; 33.452,42.926 33.934,42.926 ; 33.452,42.951 33.706,42.951 ; 33.452,42.977 33.706,42.977 ; 33.452,43.002 33.68,43.002 ; 33.477,42.799 33.909,42.799 ; 33.477,42.824 33.909,42.824 ; 33.477,42.85 33.934,42.85 ; 33.477,42.875 33.934,42.875 ; 33.477,42.901 33.934,42.901 ; 33.528,42.697 33.858,42.697 ; 33.528,42.723 33.909,42.723 ; 33.528,42.748 33.909,42.748 ; 33.528,42.774 33.909,42.774 ; 33.553,42.596 33.858,42.596 ; 33.553,42.621 33.858,42.621 ; 33.553,42.647 33.858,42.647 ; 33.553,42.672 33.858,42.672 ; 33.579,42.52 33.807,42.52 ; 33.579,42.545 33.807,42.545 ; 33.579,42.57 33.858,42.57 ; 33.579,44.552 33.909,44.552 ; 33.579,44.577 33.909,44.577 ; 33.579,45.187 33.807,45.187 ; 33.579,45.212 33.807,45.212 ; 33.63,44.602 33.909,44.602 ; 33.63,44.628 33.909,44.628 ; 33.63,44.704 33.909,44.704 ; 33.63,44.729 33.909,44.729 ; 33.68,44.653 33.909,44.653 ; 33.68,44.679 33.909,44.679 ; 33.68,45.161 33.757,45.161 ; 33.706,45.136 33.757,45.136 ; 33.731,42.951 33.96,42.951 ; 33.731,42.977 33.96,42.977 ; 33.731,43.002 33.985,43.002 ; 33.731,43.028 33.985,43.028 ; 33.731,43.053 33.985,43.053 ; 33.757,43.078 34.011,43.078 ; 33.782,43.104 34.011,43.104 ; 33.782,43.129 34.011,43.129 ; 33.782,43.155 34.011,43.155 ; 33.782,43.18 34.011,43.18 ; 33.782,43.205 34.011,43.205 ; 33.807,43.231 34.036,43.231 ; 33.807,43.256 34.036,43.256 ; 33.807,43.282 34.036,43.282 ; 33.807,43.307 34.265,43.307 ; 33.807,50.851 36.525,50.851 ; 33.858,43.332 34.265,43.332 ; 33.858,43.358 34.265,43.358 ; 33.858,43.383 34.239,43.383 ; 33.858,43.409 34.239,43.409 ; 33.884,43.434 34.239,43.434 ; 33.884,43.459 34.239,43.459 ; 33.884,43.485 34.239,43.485 ; 33.884,43.51 34.188,43.51 ; 33.909,43.536 34.188,43.536 ; 33.909,43.561 34.188,43.561 ; 33.909,43.586 34.188,43.586 ; 33.909,43.612 34.138,43.612 ; 33.909,43.637 34.138,43.637 ; 33.909,50.8 36.525,50.8 ; 33.909,50.825 36.525,50.825 ; 33.96,43.663 34.138,43.663 ; 33.96,48.565 36.525,48.565 ; 34.011,44.628 34.341,44.628 ; 34.011,44.653 34.29,44.653 ; 34.011,44.679 34.29,44.679 ; 34.011,44.704 34.29,44.704 ; 34.011,44.729 34.29,44.729 ; 34.011,44.755 34.29,44.755 ; 34.011,44.78 34.29,44.78 ; 34.011,44.806 34.29,44.806 ; 34.011,44.831 34.29,44.831 ; 34.011,44.856 34.29,44.856 ; 34.011,44.882 34.265,44.882 ; 34.011,44.907 34.265,44.907 ; 34.011,44.933 34.265,44.933 ; 34.011,44.958 34.29,44.958 ; 34.011,44.983 34.29,44.983 ; 34.011,45.009 34.29,45.009 ; 34.011,45.034 34.29,45.034 ; 34.011,45.06 34.29,45.06 ; 34.011,45.085 34.29,45.085 ; 34.011,45.11 34.29,45.11 ; 34.011,45.136 34.341,45.136 ; 34.011,45.161 34.341,45.161 ; 34.011,48.412 36.474,48.412 ; 34.011,48.438 36.474,48.438 ; 34.011,48.463 36.525,48.463 ; 34.011,48.489 36.525,48.489 ; 34.011,48.514 36.525,48.514 ; 34.011,48.539 36.525,48.539 ; 34.011,48.59 36.551,48.59 ; 34.011,48.616 36.551,48.616 ; 34.011,48.641 36.551,48.641 ; 34.011,50.775 36.551,50.775 ; 34.036,44.602 34.341,44.602 ; 34.036,48.362 36.449,48.362 ; 34.036,48.387 36.449,48.387 ; 34.036,48.666 36.576,48.666 ; 34.036,50.749 36.551,50.749 ; 34.061,43.18 34.29,43.18 ; 34.061,43.205 34.29,43.205 ; 34.061,43.231 34.29,43.231 ; 34.061,43.256 34.29,43.256 ; 34.061,43.282 34.265,43.282 ; 34.061,44.526 34.925,44.526 ; 34.061,44.552 34.442,44.552 ; 34.061,44.577 34.442,44.577 ; 34.061,45.187 34.417,45.187 ; 34.061,45.212 34.442,45.212 ; 34.061,45.237 34.925,45.237 ; 34.061,45.263 34.9,45.263 ; 34.061,48.311 36.449,48.311 ; 34.061,48.336 36.449,48.336 ; 34.112,43.053 34.341,43.053 ; 34.112,43.078 34.341,43.078 ; 34.112,43.104 34.341,43.104 ; 34.112,43.129 34.341,43.129 ; 34.112,43.155 34.341,43.155 ; 34.112,44.475 34.9,44.475 ; 34.112,44.501 34.9,44.501 ; 34.112,45.288 34.9,45.288 ; 34.112,48.235 36.424,48.235 ; 34.112,48.26 36.424,48.26 ; 34.112,48.285 36.424,48.285 ; 34.138,42.901 34.366,42.901 ; 34.138,42.926 34.366,42.926 ; 34.138,42.951 34.366,42.951 ; 34.138,42.977 34.366,42.977 ; 34.138,43.002 34.366,43.002 ; 34.138,43.028 34.341,43.028 ; 34.138,44.425 34.849,44.425 ; 34.138,44.45 34.874,44.45 ; 34.138,45.314 34.849,45.314 ; 34.138,45.339 34.849,45.339 ; 34.138,48.133 36.373,48.133 ; 34.138,48.158 36.373,48.158 ; 34.138,48.184 36.373,48.184 ; 34.138,48.209 36.373,48.209 ; 34.138,48.692 36.601,48.692 ; 34.138,48.717 36.601,48.717 ; 34.138,50.698 36.576,50.698 ; 34.138,50.724 36.576,50.724 ; 34.163,42.799 34.595,42.799 ; 34.163,42.824 34.595,42.824 ; 34.163,42.85 34.62,42.85 ; 34.163,42.875 34.62,42.875 ; 34.163,48.082 36.322,48.082 ; 34.163,48.108 36.322,48.108 ; 34.188,44.399 34.798,44.399 ; 34.188,45.364 34.849,45.364 ; 34.188,45.39 34.798,45.39 ; 34.188,48.031 36.322,48.031 ; 34.188,48.057 36.322,48.057 ; 34.188,48.743 36.601,48.743 ; 34.188,48.768 36.627,48.768 ; 34.214,42.697 34.569,42.697 ; 34.214,42.723 34.569,42.723 ; 34.214,42.748 34.569,42.748 ; 34.214,42.774 34.595,42.774 ; 34.214,44.374 34.773,44.374 ; 34.214,47.955 36.424,47.955 ; 34.214,47.981 36.373,47.981 ; 34.214,48.006 36.373,48.006 ; 34.214,50.648 36.601,50.648 ; 34.214,50.673 36.601,50.673 ; 34.239,42.57 34.519,42.57 ; 34.239,42.596 34.519,42.596 ; 34.239,42.621 34.569,42.621 ; 34.239,42.647 34.569,42.647 ; 34.239,42.672 34.569,42.672 ; 34.239,45.415 34.773,45.415 ; 34.239,47.854 36.474,47.854 ; 34.239,47.879 36.449,47.879 ; 34.239,47.904 36.449,47.904 ; 34.239,47.93 36.424,47.93 ; 34.239,48.793 36.627,48.793 ; 34.239,50.622 36.627,50.622 ; 34.29,42.52 34.519,42.52 ; 34.29,42.545 34.519,42.545 ; 34.29,44.323 34.722,44.323 ; 34.29,44.348 34.722,44.348 ; 34.29,45.441 34.747,45.441 ; 34.29,47.803 36.525,47.803 ; 34.29,47.828 36.474,47.828 ; 34.29,48.819 36.627,48.819 ; 34.29,50.597 36.627,50.597 ; 34.315,47.777 36.525,47.777 ; 34.315,48.844 36.652,48.844 ; 34.341,47.6 36.652,47.6 ; 34.341,47.625 36.627,47.625 ; 34.341,47.65 36.601,47.65 ; 34.341,47.676 36.601,47.676 ; 34.341,47.701 36.576,47.701 ; 34.341,47.727 36.551,47.727 ; 34.341,47.752 36.525,47.752 ; 34.341,48.87 36.652,48.87 ; 34.341,48.895 36.652,48.895 ; 34.341,50.546 36.627,50.546 ; 34.341,50.571 36.627,50.571 ; 34.366,45.466 34.62,45.466 ; 34.366,45.491 34.62,45.491 ; 34.392,42.901 34.62,42.901 ; 34.392,42.926 34.62,42.926 ; 34.392,42.951 34.671,42.951 ; 34.392,42.977 34.671,42.977 ; 34.392,47.498 36.703,47.498 ; 34.392,47.523 36.703,47.523 ; 34.392,47.549 36.703,47.549 ; 34.392,47.574 36.652,47.574 ; 34.392,48.92 36.703,48.92 ; 34.392,48.946 36.881,48.946 ; 34.392,50.495 36.855,50.495 ; 34.392,50.521 36.805,50.521 ; 34.417,44.298 34.569,44.298 ; 34.417,50.47 37.059,50.47 ; 34.442,43.002 34.671,43.002 ; 34.442,43.028 34.671,43.028 ; 34.442,43.053 34.671,43.053 ; 34.442,43.078 34.696,43.078 ; 34.442,43.104 34.696,43.104 ; 34.442,47.422 36.754,47.422 ; 34.442,47.447 36.754,47.447 ; 34.442,47.473 36.754,47.473 ; 34.442,48.971 36.881,48.971 ; 34.442,48.997 37.084,48.997 ; 34.442,50.444 37.059,50.444 ; 34.468,43.129 34.696,43.129 ; 34.468,43.155 34.696,43.155 ; 34.468,43.18 34.722,43.18 ; 34.468,43.205 34.747,43.205 ; 34.468,43.231 34.747,43.231 ; 34.468,43.256 34.747,43.256 ; 34.468,47.346 36.855,47.346 ; 34.468,47.371 36.805,47.371 ; 34.468,47.396 36.779,47.396 ; 34.468,49.022 37.287,49.022 ; 34.468,49.047 37.389,49.047 ; 34.468,50.419 37.236,50.419 ; 34.493,43.282 34.773,43.282 ; 34.493,43.307 34.773,43.307 ; 34.493,43.332 34.773,43.332 ; 34.493,47.269 36.855,47.269 ; 34.493,47.295 36.855,47.295 ; 34.493,47.32 36.855,47.32 ; 34.493,49.073 37.465,49.073 ; 34.493,50.368 37.567,50.368 ; 34.493,50.394 37.414,50.394 ; 34.519,43.358 34.773,43.358 ; 34.519,47.244 36.906,47.244 ; 34.519,49.098 37.643,49.098 ; 34.519,50.317 37.744,50.317 ; 34.519,50.343 37.643,50.343 ; 34.544,43.383 34.773,43.383 ; 34.544,43.409 34.773,43.409 ; 34.544,43.434 34.798,43.434 ; 34.544,43.459 34.798,43.459 ; 34.544,43.485 34.798,43.485 ; 34.544,43.51 34.798,43.51 ; 34.544,47.168 36.932,47.168 ; 34.544,47.193 36.932,47.193 ; 34.544,47.219 36.906,47.219 ; 34.544,49.124 37.744,49.124 ; 34.544,49.149 37.744,49.149 ; 34.544,50.292 37.795,50.292 ; 34.569,43.536 34.849,43.536 ; 34.569,43.561 34.849,43.561 ; 34.569,43.586 34.849,43.586 ; 34.569,43.612 34.849,43.612 ; 34.569,43.637 34.849,43.637 ; 34.569,43.663 34.874,43.663 ; 34.569,44.552 34.95,44.552 ; 34.569,44.577 34.95,44.577 ; 34.569,45.212 34.95,45.212 ; 34.569,47.066 36.881,47.066 ; 34.569,47.092 36.932,47.092 ; 34.569,47.117 36.932,47.117 ; 34.569,47.142 36.957,47.142 ; 34.569,49.174 37.795,49.174 ; 34.569,49.2 37.795,49.2 ; 34.569,49.225 37.795,49.225 ; 34.569,50.216 37.795,50.216 ; 34.569,50.241 37.795,50.241 ; 34.569,50.267 37.795,50.267 ; 34.62,45.187 34.95,45.187 ; 34.62,46.99 36.805,46.99 ; 34.62,47.015 36.805,47.015 ; 34.62,47.041 36.855,47.041 ; 34.62,49.251 37.795,49.251 ; 34.62,49.276 37.795,49.276 ; 34.62,49.301 37.795,49.301 ; 34.62,49.327 37.795,49.327 ; 34.62,50.114 37.795,50.114 ; 34.62,50.14 37.795,50.14 ; 34.62,50.165 37.795,50.165 ; 34.62,50.19 37.795,50.19 ; 34.646,44.602 34.95,44.602 ; 34.646,46.939 36.779,46.939 ; 34.646,46.965 36.779,46.965 ; 34.646,49.352 37.795,49.352 ; 34.646,49.378 37.795,49.378 ; 34.646,49.403 37.795,49.403 ; 34.646,50.013 37.795,50.013 ; 34.646,50.038 37.795,50.038 ; 34.646,50.063 37.795,50.063 ; 34.646,50.089 37.795,50.089 ; 34.671,44.628 34.95,44.628 ; 34.671,44.653 34.95,44.653 ; 34.671,44.679 34.95,44.679 ; 34.671,45.11 35.001,45.11 ; 34.671,45.136 34.95,45.136 ; 34.671,45.161 34.95,45.161 ; 34.671,46.812 35.027,46.812 ; 34.671,46.838 35.103,46.838 ; 34.671,46.863 35.103,46.863 ; 34.671,46.888 35.154,46.888 ; 34.671,46.914 36.754,46.914 ; 34.671,49.428 37.795,49.428 ; 34.671,49.454 37.795,49.454 ; 34.671,49.479 37.795,49.479 ; 34.671,49.505 37.795,49.505 ; 34.671,49.53 37.795,49.53 ; 34.671,49.555 37.795,49.555 ; 34.671,49.581 37.795,49.581 ; 34.671,49.606 37.795,49.606 ; 34.671,49.632 37.795,49.632 ; 34.671,49.657 37.795,49.657 ; 34.671,49.682 37.795,49.682 ; 34.671,49.708 37.795,49.708 ; 34.671,49.733 37.795,49.733 ; 34.671,49.759 37.795,49.759 ; 34.671,49.784 37.795,49.784 ; 34.671,49.809 37.795,49.809 ; 34.671,49.835 37.795,49.835 ; 34.671,49.86 37.795,49.86 ; 34.671,49.886 37.795,49.886 ; 34.671,49.911 37.795,49.911 ; 34.671,49.936 37.795,49.936 ; 34.671,49.962 37.795,49.962 ; 34.671,49.987 37.795,49.987 ; 34.696,45.085 35.001,45.085 ; 34.722,44.704 35.001,44.704 ; 34.722,44.729 35.001,44.729 ; 34.722,44.755 35.001,44.755 ; 34.722,44.78 35.001,44.78 ; 34.722,44.806 35.001,44.806 ; 34.722,44.831 35.001,44.831 ; 34.722,44.856 35.001,44.856 ; 34.722,44.882 35.001,44.882 ; 34.722,44.907 35.001,44.907 ; 34.722,44.933 35.001,44.933 ; 34.722,44.958 35.001,44.958 ; 34.722,44.983 35.001,44.983 ; 34.722,45.009 35.001,45.009 ; 34.722,45.034 35.001,45.034 ; 34.722,45.06 35.001,45.06 ; 34.722,46.736 34.874,46.736 ; 34.722,46.761 34.95,46.761 ; 34.722,46.787 34.95,46.787 ; 34.773,46.711 34.798,46.711 ; 34.874,42.723 35.814,42.723 ; 34.874,42.748 35.814,42.748 ; 34.874,42.774 35.23,42.774 ; 34.874,42.799 35.128,42.799 ; 34.874,42.824 35.103,42.824 ; 34.874,42.85 35.103,42.85 ; 34.874,42.875 35.103,42.875 ; 34.874,42.901 35.103,42.901 ; 34.874,42.926 35.103,42.926 ; 34.874,42.951 35.128,42.951 ; 34.874,42.977 35.128,42.977 ; 34.874,43.002 35.814,43.002 ; 34.9,42.672 35.814,42.672 ; 34.9,42.697 35.814,42.697 ; 34.9,43.028 35.814,43.028 ; 34.9,43.053 35.814,43.053 ; 34.9,43.51 35.763,43.51 ; 34.95,42.621 35.814,42.621 ; 34.95,42.647 35.814,42.647 ; 34.95,43.078 35.814,43.078 ; 34.95,43.485 35.789,43.485 ; 34.95,43.536 35.763,43.536 ; 34.95,43.561 35.712,43.561 ; 34.976,42.57 35.814,42.57 ; 34.976,42.596 35.814,42.596 ; 34.976,43.104 35.814,43.104 ; 34.976,43.459 35.789,43.459 ; 34.976,43.586 35.687,43.586 ; 35.001,43.129 35.814,43.129 ; 35.001,43.155 35.814,43.155 ; 35.001,43.434 35.204,43.434 ; 35.001,43.612 35.662,43.612 ; 35.001,43.637 35.662,43.637 ; 35.052,42.545 35.484,42.545 ; 35.052,43.383 35.128,43.383 ; 35.052,43.409 35.128,43.409 ; 35.103,43.18 35.814,43.18 ; 35.103,43.205 35.814,43.205 ; 35.103,43.663 35.56,43.663 ; 35.128,42.52 35.458,42.52 ; 35.154,44.552 35.535,44.552 ; 35.154,44.577 35.535,44.577 ; 35.154,44.602 35.458,44.602 ; 35.154,44.628 35.458,44.628 ; 35.154,44.653 35.433,44.653 ; 35.154,44.679 35.433,44.679 ; 35.154,44.704 35.433,44.704 ; 35.154,44.729 35.433,44.729 ; 35.154,44.755 35.433,44.755 ; 35.154,44.78 35.433,44.78 ; 35.154,44.806 35.433,44.806 ; 35.154,44.831 35.433,44.831 ; 35.154,44.856 35.433,44.856 ; 35.154,44.882 35.433,44.882 ; 35.154,44.907 35.433,44.907 ; 35.154,44.933 35.433,44.933 ; 35.154,44.958 35.433,44.958 ; 35.154,44.983 35.433,44.983 ; 35.154,45.009 35.433,45.009 ; 35.154,45.034 35.433,45.034 ; 35.154,45.06 35.433,45.06 ; 35.154,45.085 35.433,45.085 ; 35.154,45.11 35.433,45.11 ; 35.154,45.136 35.433,45.136 ; 35.154,45.161 35.433,45.161 ; 35.154,45.187 35.433,45.187 ; 35.154,45.212 35.433,45.212 ; 35.154,45.237 35.433,45.237 ; 35.154,45.263 35.433,45.263 ; 35.154,45.288 35.433,45.288 ; 35.154,45.314 35.433,45.314 ; 35.154,45.339 35.433,45.339 ; 35.154,45.364 35.433,45.364 ; 35.154,45.39 35.433,45.39 ; 35.154,45.415 35.433,45.415 ; 35.154,45.441 35.433,45.441 ; 35.179,45.466 35.204,45.466 ; 35.179,45.491 35.204,45.491 ; 35.179,52.502 36.754,52.502 ; 35.204,44.475 36.093,44.475 ; 35.204,44.501 36.093,44.501 ; 35.204,44.526 36.093,44.526 ; 35.23,43.688 35.433,43.688 ; 35.23,44.425 36.093,44.425 ; 35.23,44.45 36.093,44.45 ; 35.23,52.527 36.754,52.527 ; 35.255,52.553 36.703,52.553 ; 35.255,52.578 36.703,52.578 ; 35.281,44.399 36.093,44.399 ; 35.281,46.863 36.652,46.863 ; 35.281,46.888 36.703,46.888 ; 35.306,44.374 35.789,44.374 ; 35.306,46.838 36.652,46.838 ; 35.331,44.323 35.763,44.323 ; 35.331,52.603 36.652,52.603 ; 35.357,45.466 35.382,45.466 ; 35.357,45.491 35.382,45.491 ; 35.382,44.348 35.763,44.348 ; 35.382,46.812 36.627,46.812 ; 35.382,52.629 36.627,52.629 ; 35.382,52.654 36.627,52.654 ; 35.433,42.774 35.814,42.774 ; 35.433,46.761 36.601,46.761 ; 35.433,46.787 36.601,46.787 ; 35.433,52.68 36.601,52.68 ; 35.458,43.434 35.789,43.434 ; 35.458,44.298 35.662,44.298 ; 35.484,46.736 36.551,46.736 ; 35.484,52.705 36.551,52.705 ; 35.509,46.711 36.525,46.711 ; 35.535,42.799 35.814,42.799 ; 35.535,42.824 35.814,42.824 ; 35.535,42.85 35.814,42.85 ; 35.535,42.875 35.814,42.875 ; 35.535,42.901 35.814,42.901 ; 35.535,42.926 35.814,42.926 ; 35.535,42.951 35.814,42.951 ; 35.535,42.977 35.814,42.977 ; 35.535,43.256 35.814,43.256 ; 35.535,43.282 35.814,43.282 ; 35.535,43.307 35.814,43.307 ; 35.535,43.332 35.789,43.332 ; 35.535,43.358 35.789,43.358 ; 35.535,43.383 35.789,43.383 ; 35.535,43.409 35.789,43.409 ; 35.535,52.73 36.525,52.73 ; 35.535,52.756 36.525,52.756 ; 35.56,42.52 35.789,42.52 ; 35.56,42.545 35.789,42.545 ; 35.56,43.231 35.814,43.231 ; 35.585,46.66 36.474,46.66 ; 35.585,46.685 36.474,46.685 ; 35.585,52.781 36.474,52.781 ; 35.585,52.807 36.474,52.807 ; 35.636,46.609 36.449,46.609 ; 35.636,46.634 36.449,46.634 ; 35.662,52.832 36.424,52.832 ; 35.712,44.552 36.093,44.552 ; 35.712,44.577 36.093,44.577 ; 35.712,46.584 36.424,46.584 ; 35.712,52.857 36.424,52.857 ; 35.738,46.558 36.373,46.558 ; 35.763,44.602 36.093,44.602 ; 35.763,44.628 36.093,44.628 ; 35.763,46.507 36.322,46.507 ; 35.763,46.533 36.322,46.533 ; 35.763,52.883 36.373,52.883 ; 35.763,52.908 36.373,52.908 ; 35.814,44.323 36.093,44.323 ; 35.814,44.348 36.093,44.348 ; 35.814,44.374 36.093,44.374 ; 35.814,44.653 36.093,44.653 ; 35.814,44.679 36.093,44.679 ; 35.814,44.704 36.093,44.704 ; 35.814,44.729 36.093,44.729 ; 35.814,44.755 36.093,44.755 ; 35.814,44.78 36.093,44.78 ; 35.814,44.806 36.093,44.806 ; 35.814,44.831 36.093,44.831 ; 35.814,44.856 36.093,44.856 ; 35.814,44.882 36.093,44.882 ; 35.814,44.907 36.093,44.907 ; 35.814,44.933 36.093,44.933 ; 35.814,44.958 36.093,44.958 ; 35.814,44.983 36.093,44.983 ; 35.814,45.009 36.093,45.009 ; 35.814,45.034 36.093,45.034 ; 35.814,45.06 36.093,45.06 ; 35.814,45.085 36.093,45.085 ; 35.814,45.11 36.093,45.11 ; 35.814,45.136 36.093,45.136 ; 35.814,45.161 36.093,45.161 ; 35.814,45.187 36.093,45.187 ; 35.814,45.212 36.093,45.212 ; 35.814,45.237 36.093,45.237 ; 35.814,45.263 36.093,45.263 ; 35.814,45.288 36.093,45.288 ; 35.814,45.314 36.093,45.314 ; 35.814,45.339 36.093,45.339 ; 35.814,45.364 36.093,45.364 ; 35.814,45.39 36.093,45.39 ; 35.814,45.415 36.093,45.415 ; 35.814,45.441 36.093,45.441 ; 35.814,52.934 36.322,52.934 ; 35.865,45.466 35.89,45.466 ; 35.865,45.491 35.89,45.491 ; 35.865,46.482 36.297,46.482 ; 35.865,52.959 36.297,52.959 ; 35.865,52.984 36.297,52.984 ; 35.89,46.431 36.271,46.431 ; 35.89,46.457 36.271,46.457 ; 35.916,53.01 36.271,53.01 ; 35.966,46.406 36.22,46.406 ; 35.966,53.035 36.22,53.035 ; 35.992,46.38 36.195,46.38 ; 35.992,53.061 36.195,53.061 ; 35.992,53.086 36.195,53.086 ; 36.043,42.52 36.297,42.52 ; 36.043,42.545 36.297,42.545 ; 36.043,42.57 36.297,42.57 ; 36.043,42.596 36.297,42.596 ; 36.043,42.621 36.297,42.621 ; 36.043,42.647 36.297,42.647 ; 36.043,42.672 36.297,42.672 ; 36.043,42.697 36.297,42.697 ; 36.043,42.723 36.297,42.723 ; 36.043,42.748 36.297,42.748 ; 36.043,42.774 36.297,42.774 ; 36.043,42.799 36.297,42.799 ; 36.043,42.824 36.297,42.824 ; 36.043,42.85 36.297,42.85 ; 36.043,42.875 36.297,42.875 ; 36.043,42.901 36.297,42.901 ; 36.043,42.926 36.297,42.926 ; 36.043,42.951 36.297,42.951 ; 36.043,42.977 36.297,42.977